# Altium PCB Touchscreen PCB.PcbDoc
Units mm, origin at the board's own origin, x right, y up, seen from the top; angles counter-clockwise.
Board outline 55 x 53 mm, 2 copper layers (L1 (Signal), L2 (Ground)); 49 components, 55 nets, 253 pads, 82 vias.
Unrouted connection lines stored in the file: 13.
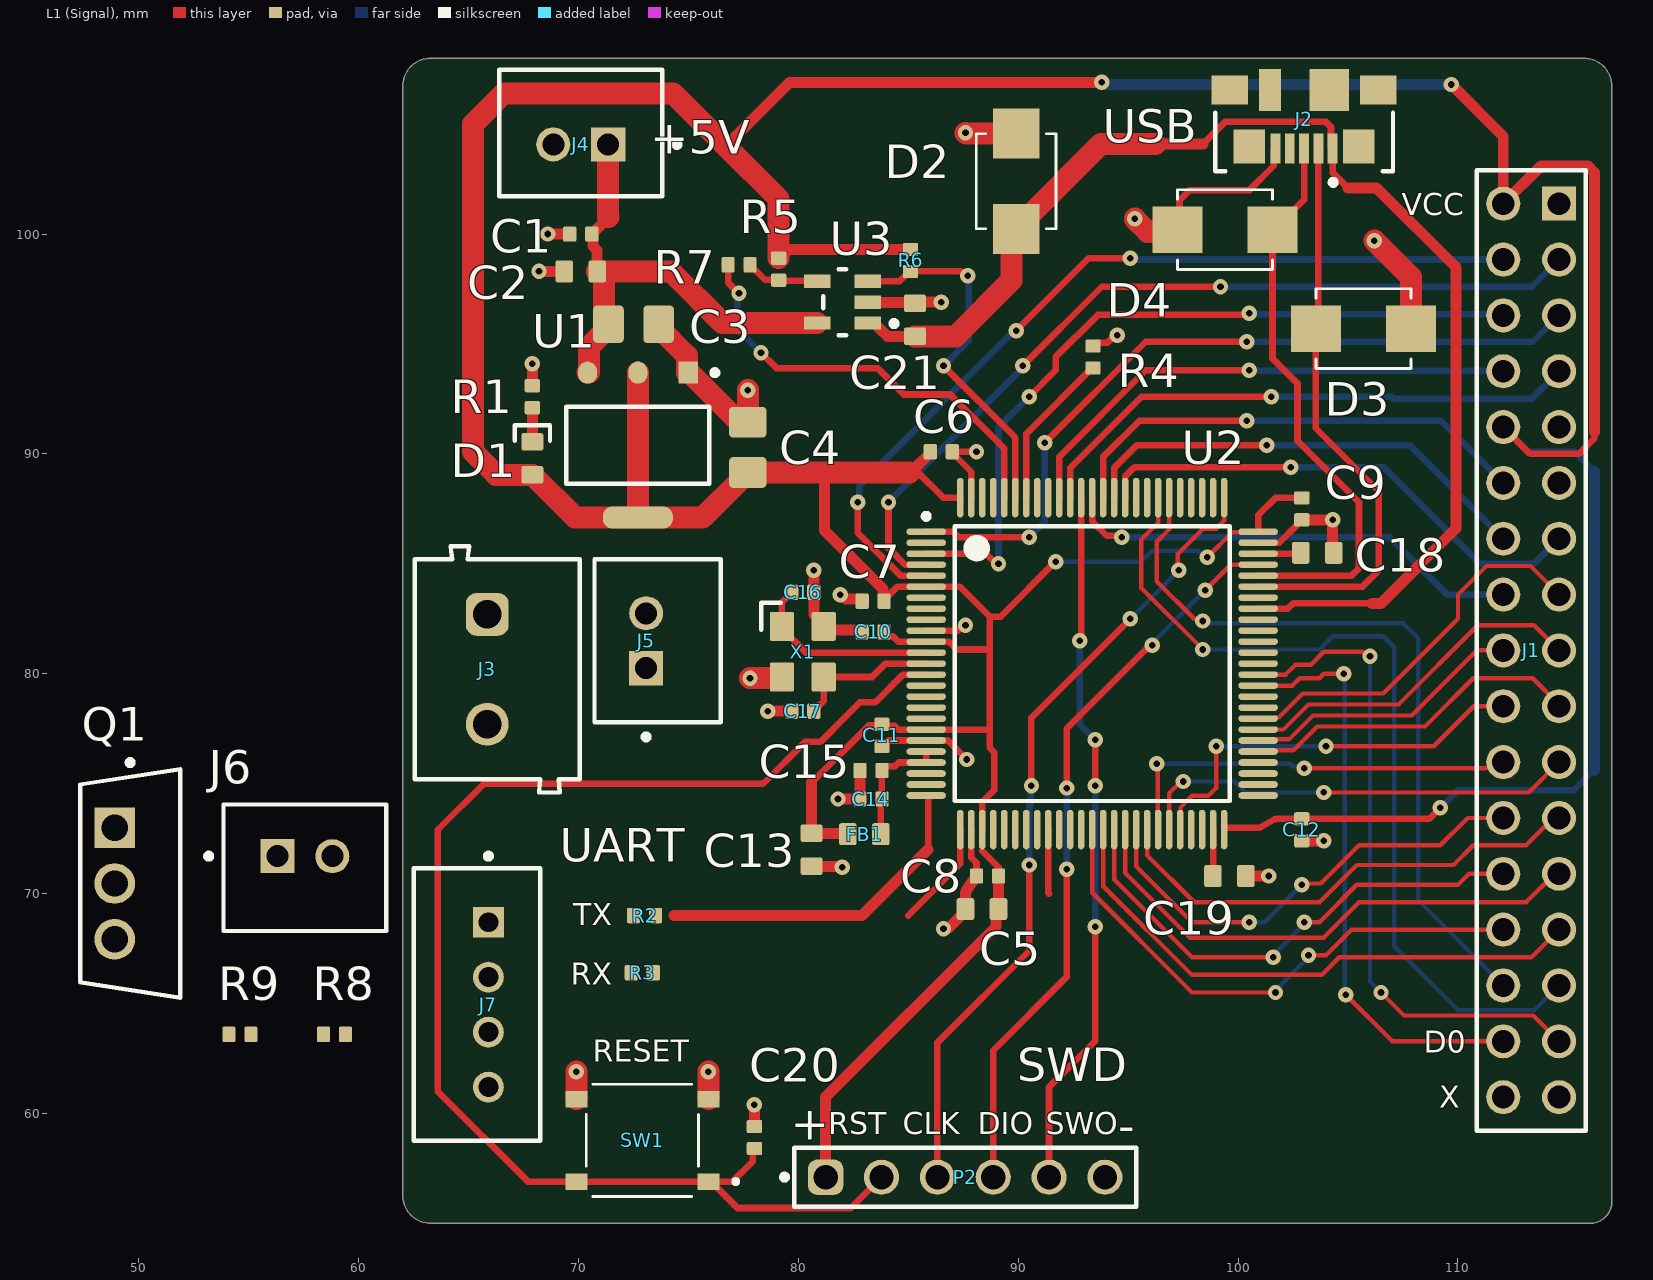
[diagram p0: L1 (Signal) view]
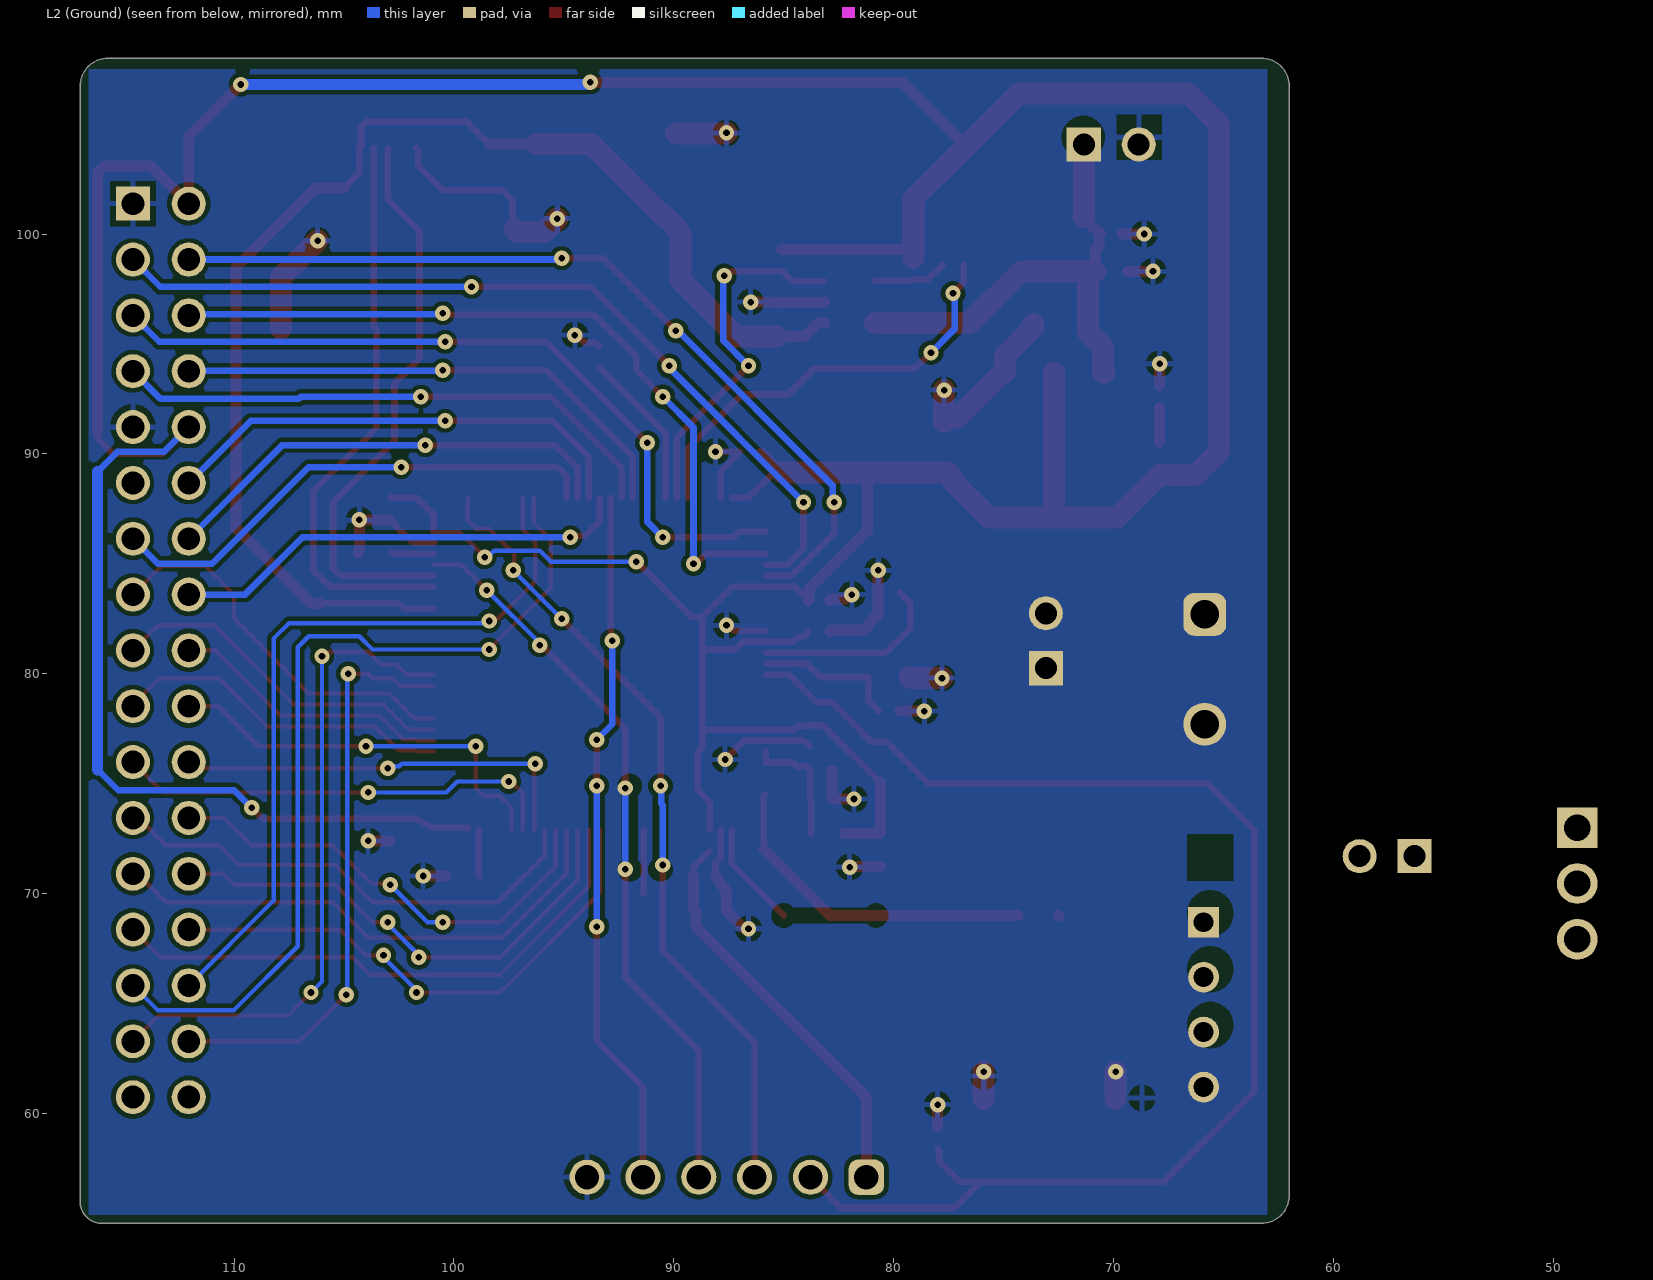
[diagram p1: L2 (Ground) view, seen from below]
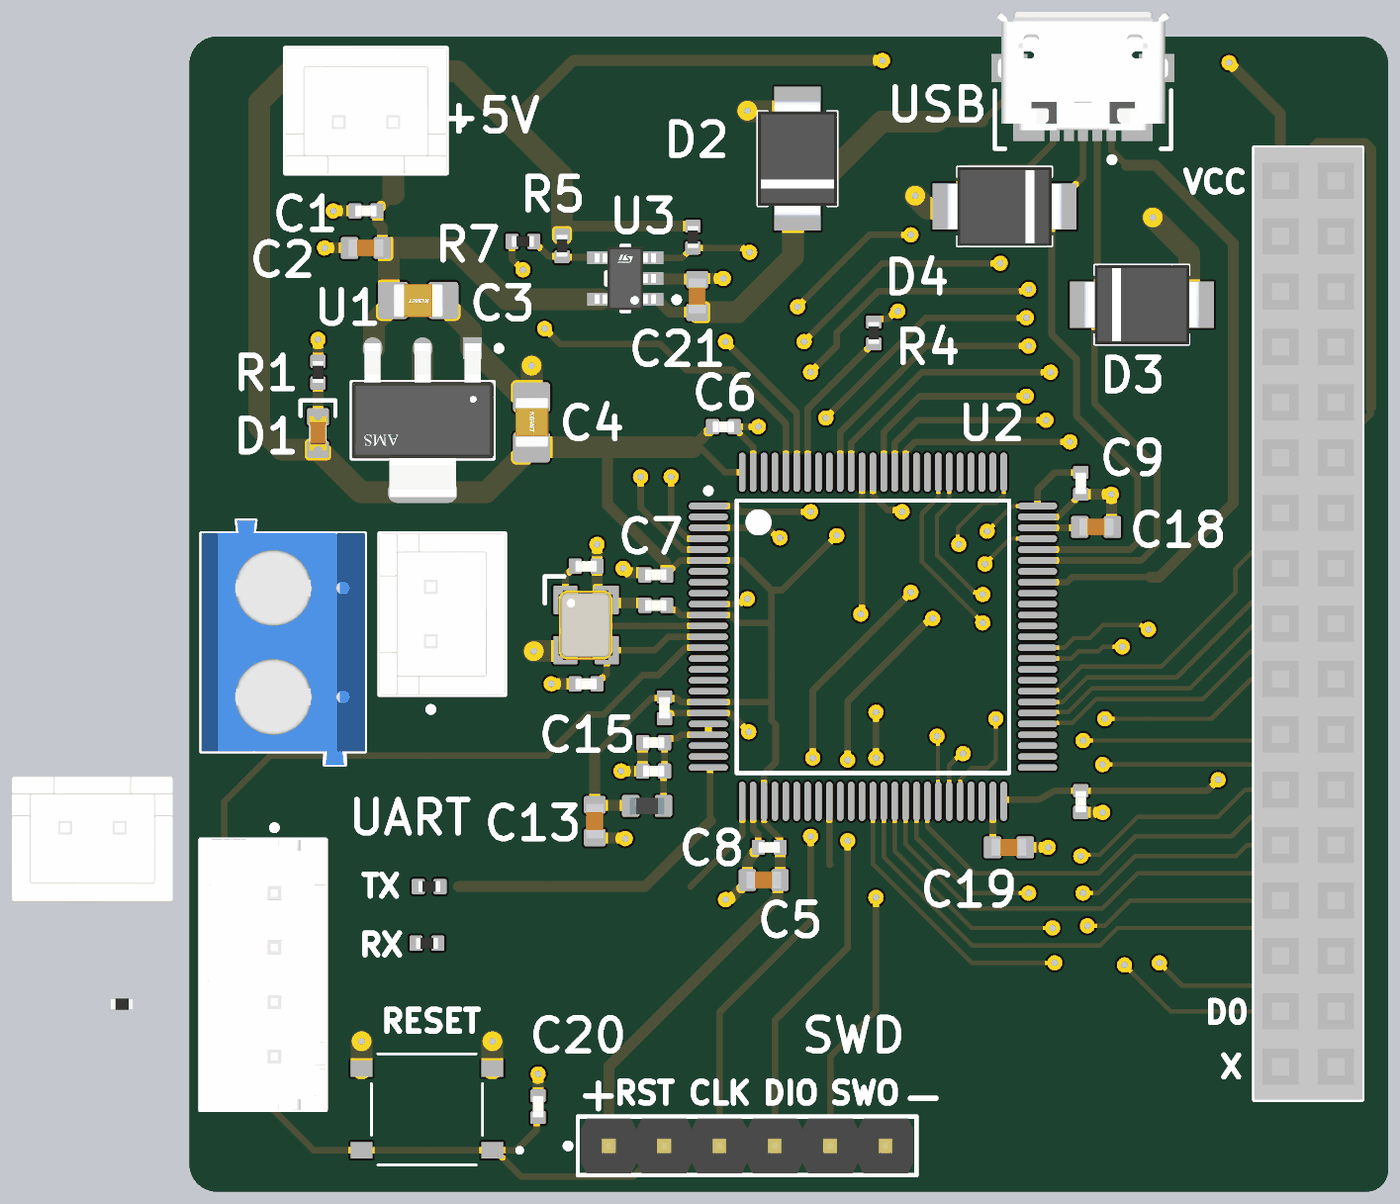
[diagram p2: 3D render of the assembled board from above, using the file's embedded part models]

## Layer stack, top to bottom
Top Solder: solder mask 0.0102, Solder Resist, Dk 3.5
L1 (Signal): signal copper 0.0356
Dielectric 1: dielectric 0.32, FR-4, Dk 4.8
L2 (Ground): signal copper 0.0356
Bottom Solder: solder mask 0.0102, Solder Resist, Dk 3.5

## Board outline
62,56.27 62,106.73 cw(c63.27,106.73) 63.27,108 115.73,108 cw(c115.73,106.73) 117,106.73 117,56 cw(c116,56) 116,55 63.27,55 cw(c63.27,56.27)

## Design rules (kind name [scope] priority, off if disabled: settings)
Clearance [All] p1: gap=0.2 ignorepadtopadclearanceinfootprint=FALSE
PolygonConnect [All] p1: connectstyle=Relief reliefconductorwidth=0.254 reliefentries=4 polygonreliefangle="90 Angle" airgapwidth=0.254
RoutingVias [All] p1: holewidth=0.3 width=0.7 viastyle="Through Hole" minholewidth=0.25 minwidth=0.55 maxholewidth=0.4 maxwidth=0.9
SolderMaskExpansion [All] p1: expansion=0.102 istentingtop=FALSE
SupplyNets "Schematic Supply Nets_3" [InNet('+24V')] p1: voltage=0.000
SupplyNets "Schematic Supply Nets_2" [InNet('+5V')] p2: voltage=0.000
SupplyNets "Schematic Supply Nets_1" [InNet('VCC')] p3: voltage=0.000
SupplyNets "Schematic Supply Nets" [InNet('GND')] p4: voltage=0.000
Width [All] p1: maxlimit=1 minlimit=0.2 preferedwidth=0.3 minimp=50.000000 maximp=50.000000 favimp=50.000000
30 further rules are at their usual default settings.

## Components (designator, comment, footprint, x,y, rotation, side; value= is the part's Value field where it differs from the comment)
C1 "100n" CAP_0402 70.1,100 r0 top
C2 "10u" CAP_0603 70.1,98.3 r0 top
C3 "22u" CAP_0805 72.5,95.9 r180 top
C4 "22u" CAP_0805 77.7,90.3 r270 top
C5 "10u" CAP_0603 88.35,69.3 r0 top
C6 "100n" CAP_0402 86.5,90.1 r180 top
C7 "100n" CAP_0402 83.4,83.3 r0 top
C8 "100n" CAP_0402 88.6,70.8 r0 top
C9 "100n" CAP_0402 102.9,87.5 r90 top
C10 "100n" CAP_0402 83.4,81.9 r0 top
C11 "100n" CAP_0402 83.8,77.2 r90 top
C12 "100n" CAP_0402 102.9,72.9 r90 top
C13 "10u" CAP_0603 80.6,72 r90 top
C14 "1u" CAP_0402 83.3,74.3 r180 top
C15 "100n" CAP_0402 83.3,75.6 r0 top
C16 "10p" CAP_0402 80.2,83.7 r180 top
C17 "10p" CAP_0402 80.2,78.3 r0 top
C18 "2u2" CAP_0603 103.6,85.5 r180 top
C19 "2u2" CAP_0603 99.6,70.8 r180 top
C20 "100n" CAP_0402 78,58.9 r270 top
C21 "4u7" CAP_0603 85.3,96.1 r270 top
D1 "RED" LED_0603_RED 67.9,89.8 r270 top
D2 "SMBJ6.5CA" DIOM4336X265N 89.9,102.4 r270 top
D3 "SMBJ6.5CA" DIOM4336X265N 105.7,95.7 r180 top
D4 "SMBJ6.5CA" DIOM4336X265N 99.4,100.2 r0 top
FB1 "120R" FB_0603 83,72.7 r0 top
J1 "2x17 Odd-Even" SMTC-SSW-117-01-X-D 114.6,101.38 r270 top
J2 "473460001" FP-473460001-MFG 103,106.2 r180 top
J3 "691102710002" 691102710002 66.3,80.2 r270 top
J4 "B2B-XH-A(LF)(SN)" FP-B2B-XH-A_LF_SN-MFG 70.1,104.6 r180 top
J5 "B2B-XH-A(LF)(SN)" FP-B2B-XH-A_LF_SN-MFG 73.6,81.5 r90 top
J6 "B2B-XH-A(LF)(SN)" FP-B2B-XH-A_LF_SN-MFG 57.55,71.175 r0 top
J7 "B4B-XH-A(LF)(SN)" FP-B4B-XH-A_LF_SN-MFG 65.375,64.95 r90 top
P2 "" 61300611121 87.59,57.1 r0 top
Q1 "IRLZ44NPbF" FP-PG-TO220-3-MFG 49.605,70.46 r0 top
R1 "4k7" RES_0402 67.9,92.6 r270 top
R2 "220" RES_0402 73,69 r0 top
R3 "220" RES_0402 72.9,66.4 r0 top
R4 "10k" RES_0402 93.4,94.4 r270 top
R5 "10k" RES_0402 79.1,98.4 r90 top
R6 "47k" RES_0402 85.1,98.8 r90 top
R7 "0" RES_0402 77.3,98.6 r0 top
R8 "1k" RES_0402 58.9,63.6 r0 top
R9 "10k" RES_0402 54.6,63.6 r0 top
SW1 "" SW_TS-1187A-B-A-B 72.9,58.775 r180 top
U1 "AMS1117-3.3" FP-AMS1117-IPC_C 72.7,90.4 r270 top
U2 "STM32F429VIT6" STM-LQFP100_N 93.361,80.461 r0 top
U3 "STMPS2141STR" FP-SOT23-5L-MFG 82,96.9 r180 top
X1 "16MHz" XTAL_3225 80.2,81 r270 top

## Footprints (in the part's own frame and the unit in brackets; to place one, negate y for a bottom-side part, rotate by r counter-clockwise, add the part's x,y. Pads: shape width x height; smd on the part's side, far side on the other; paste and mask are expansions set on the pad)
61300611121 [mm] "Pin Header, pitch 2.54 mm, THT, Vertical, single row, 6p"
  rrect50% 1.6x1.6 hole 1.1: 1(-6.35,0)
  round 1.6 hole 1.1: 2(-3.81,0) 3(-1.27,0) 4(1.27,0) 5(3.81,0) 6(6.35,0)
  silkscreen extent -8.34,-1.35 7.77,1.35, body extent -7.62,-1.27 7.62,1.27, height 8.57
691102710002 [mm] "5,00mm - modular - blue - Horizontal entry with pressure clamp - 9,9 mm height - 02p"
  rrect50% 1.95x1.95 hole 1.3: 1(-2.5,-0.45)
  round 1.95 hole 1.3: 2(2.5,-0.45)
  silkscreen extent -5.6,-3.75 5.6,3.75, body extent -5.6,-3.75 5.6,3.75, height 9.96
CAP_0402 [mm]
  rrect25% 0.6x0.7 smd: 1(-0.5,0) 2(0.5,0)
  body extent -0.5,-0.26 0.5,0.26, height 0.37
CAP_0603 [mm]
  rrect25% 0.8x1 smd: 1(-0.75,0) 2(0.75,0)
  body extent -0.8,-0.4 0.8,0.4, height 0.51
CAP_0805 [mm]
  rrect25% 1.4x1.7 smd: 1(-1.143,0) 2(1.143,0)
  body extent -1.15,-0.76 1.15,0.79, height 1.01
DIOM4336X265N [mm]
  rect 2.28x2.12 smd: 1(-2.165,0) 2(2.165,0)
  silkscreen extent -2.16,-1.81 2.16,1.81, body extent -2.68,-1.81 2.68,1.81, height 2.65
FB_0603 [mm]
  rrect25% 0.8x1 smd: 1(-0.75,0) 2(0.75,0)
  body extent -0.8,-0.4 0.8,0.4, height 0.81
FP-473460001-MFG [mm]
  rect 0.45x1.38 smd paste+0 mask+0: 1(-1.3,2.31) 2(-0.65,2.31) 3(0,2.31) 4(0.65,2.31) 5(1.3,2.31)
  rect 1.425x1.55 smd paste+0 mask+0: 6(-2.488,2.225) 7(2.488,2.225)
  rect 1.65x1.3 smd paste+0 mask+0: 8(-3.375,-0.35) 11(3.375,-0.35)
  rect 1.8x1.9 smd paste+0 mask+0: 9(-1.15,-0.35)
  rect 1x1.9 smd paste+0 mask+0: 10(1.55,-0.35)
  silkscreen extent -4.05,0.67 4.05,3.97, body extent -4.3,-2.48 4.3,3.45, height 0.25
FP-AMS1117-IPC_C [mm]
  rect 1.004x0.872 smd paste+0 mask+0: 1(-3.295,2.29)
  rrect100% 1.004x0.872 smd paste+0 mask+0: 2(-3.295,0) 3(-3.295,-2.29)
  rrect87% 1.004x3.182 smd paste+0 mask+0: 4(3.295,0)
  silkscreen extent -3.42,-3.25 1.75,3.63, body extent -3.9,-3.35 3.9,3.35, height 0.25
FP-B2B-XH-A_LF_SN-MFG [mm]
  rect 1.55x1.55 hole 1 paste-2539.97 mask+0: 1(-1.25,0.525)
  round 1.55 hole 1 paste-2539.97 mask+0: 2(1.25,0.525)
  silkscreen extent -4.5,-2.88 3.7,2.88, body extent -3.8,-2.98 3.8,2.98, height 0.25
FP-B4B-XH-A_LF_SN-MFG [mm]
  rect 1.4x1.4 hole 0.9 paste-2539.97 mask+0: 1(3.75,-0.525)
  round 1.4 hole 0.9 paste-2539.97 mask+0: 2(1.25,-0.525) 3(-1.25,-0.525) 4(-3.75,-0.525)
  silkscreen extent -6.2,-2.88 6.87,2.88, body extent -6.3,-2.98 6.3,2.98, height 0.25
FP-PG-TO220-3-MFG [mm]
  rect 1.85x1.85 hole 1.2 paste-2539.97 mask+0: 1(-0.705,2.54)
  round 1.85 hole 1.2 paste-2539.97 mask+0: 2(-0.705,0) 3(-0.705,-2.54)
  silkscreen extent -2.27,-5.2 2.27,5.62, body extent -2.37,-5.55 2.37,5.55, height 0.25
FP-SOT23-5L-MFG [mm]
  rect 1.2x0.6 smd paste+0 mask+0: 1(-1.15,0.95) 2(-1.15,0) 3(-1.15,-0.95) 4(1.15,-0.95) 5(1.15,0.95)
  silkscreen extent -2.48,-1.5 0.87,1.5, body extent -1.85,-1.6 1.85,1.6, height 0.25
LED_0603_RED [mm]
  rrect25% 0.8x1 smd: A(0.75,0) K(-0.75,0)
  silkscreen extent -1.5,-0.8 -0.8,0.8, body extent -0.8,-0.4 0.8,0.4, height 0.6
RES_0402 [mm]
  rrect25% 0.6x0.7 smd: 1(-0.5,0) 2(0.5,0)
  body extent -0.5,-0.25 0.5,0.25, height 0.3
SMTC-SSW-117-01-X-D [mm] "SQ Post Socket, 2x17 Pins, Vertical, 2.54mm Pitch, Female"
  rect 1.55x1.55 hole 1.04: 1(0,0)
  round 1.55 hole 1.04: 2(0,-2.54) 3(2.54,0) 4(2.54,-2.54) 5(5.08,0) 6(5.08,-2.54) 7(7.62,0) 8(7.62,-2.54) 9(10.16,0) 10(10.16,-2.54) 11(12.7,0) 12(12.7,-2.54) 13(15.24,0) 14(15.24,-2.54) 15(17.78,0) 16(17.78,-2.54) 17(20.32,0) 18(20.32,-2.54) 19(22.86,0) 20(22.86,-2.54) 21(25.4,0) 22(25.4,-2.54) 23(27.94,0) 24(27.94,-2.54) 25(30.48,0) 26(30.48,-2.54) 27(33.02,0) 28(33.02,-2.54) 29(35.56,0) 30(35.56,-2.54) 31(38.1,0) 32(38.1,-2.54) 33(40.64,0) 34(40.64,-2.54)
  silkscreen extent -1.53,-3.74 42.17,1.2, body extent -1.52,-3.75 42.16,1.21, height 8.51
STM-LQFP100_N [mm] "Thin QFP, 100-Leads, Body 14x14mm, Pitch 0.5mm, IPC Medium Density"
  oval 1.8x0.3 smd: 1(-7.55,6) 2(-7.55,5.5) 3(-7.55,5) 4(-7.55,4.5) 5(-7.55,4) 6(-7.55,3.5) 7(-7.55,3) 8(-7.55,2.5) 9(-7.55,2) 10(-7.55,1.5) 11(-7.55,1) 12(-7.55,0.5) 13(-7.55,0) 14(-7.55,-0.5) 15(-7.55,-1) 16(-7.55,-1.5) 17(-7.55,-2) 18(-7.55,-2.5) 19(-7.55,-3) 20(-7.55,-3.5) 21(-7.55,-4) 22(-7.55,-4.5) 23(-7.55,-5) 24(-7.55,-5.5) 25(-7.55,-6) 51(7.55,-6) 52(7.55,-5.5) 53(7.55,-5) 54(7.55,-4.5) 55(7.55,-4) 56(7.55,-3.5) 57(7.55,-3) 58(7.55,-2.5) 59(7.55,-2) 60(7.55,-1.5) 61(7.55,-1) 62(7.55,-0.5) 63(7.55,0) 64(7.55,0.5) 65(7.55,1) 66(7.55,1.5) 67(7.55,2) 68(7.55,2.5) 69(7.55,3) 70(7.55,3.5) 71(7.55,4) 72(7.55,4.5) 73(7.55,5) 74(7.55,5.5) 75(7.55,6)
  oval 0.3x1.8 smd: 26(-6,-7.55) 27(-5.5,-7.55) 28(-5,-7.55) 29(-4.5,-7.55) 30(-4,-7.55) 31(-3.5,-7.55) 32(-3,-7.55) 33(-2.5,-7.55) 34(-2,-7.55) 35(-1.5,-7.55) 36(-1,-7.55) 37(-0.5,-7.55) 38(0,-7.55) 39(0.5,-7.55) 40(1,-7.55) 41(1.5,-7.55) 42(2,-7.55) 43(2.5,-7.55) 44(3,-7.55) 45(3.5,-7.55) 46(4,-7.55) 47(4.5,-7.55) 48(5,-7.55) 49(5.5,-7.55) 50(6,-7.55) 76(6,7.55) 77(5.5,7.55) 78(5,7.55) 79(4.5,7.55) 80(4,7.55) 81(3.5,7.55) 82(3,7.55) 83(2.5,7.55) 84(2,7.55) 85(1.5,7.55) 86(1,7.55) 87(0.5,7.55) 88(0,7.55) 89(-0.5,7.55) 90(-1,7.55) 91(-1.5,7.55) 92(-2,7.55) 93(-2.5,7.55) 94(-3,7.55) 95(-3.5,7.55) 96(-4,7.55) 97(-4.5,7.55) 98(-5,7.55) 99(-5.5,7.55) 100(-6,7.55)
  silkscreen extent -7.67,-6.25 6.25,6.82, body extent -7,-7 7,7, height 1.6
SW_TS-1187A-B-A-B [mm]
  rect 1x0.75 smd: A(-3,1.875) B(3,1.875) C(-3,-1.875) D(3,-1.875)
  silkscreen extent -4.35,-2.55 2.55,2.55
XTAL_3225 [mm]
  rrect10% 1.3x1.1 smd: 1(-1.15,-0.95) 2(1.15,-0.95) 3(1.15,0.95) 4(-1.15,0.95)
  silkscreen extent -2.23,-1.89 -1,-1, body extent -1.6,-1.28 1.6,1.22, height 0.61

## Part data
C1 C6 C7 C8 C9 C10 C11 C12 C15 C20: library part CAP_0402, "Capacitor SMD 0402", LCSC=C1525, Manufacturer="Samsung Electro-Mechanics", Manufacturer Part Number=CL05B104KO5NNNC, Rating=16V
C2 C5 C13: library part CAP_0603, "Capacitor SMD 0603", LCSC=C96446, Manufacturer="*Samsung Electro-Mechanics", Manufacturer Part Number=CL10A106MA8NRNC, Rating=25V
C3 C4: library part CAP_0805, "Capacitor SMD 0805", LCSC=C45783, Manufacturer="Samsung Electro-Mechanics", Manufacturer Part Number=CL21A226MAQNNNE, Rating=25V
C14: library part CAP_0402, "Capacitor SMD 0402", LCSC=C52923, Manufacturer="Samsung Electro-Mechanics", Manufacturer Part Number=CL05A105KA5NQNC, Rating=25V
C16 C17: library part CAP_0402, "Capacitor SMD 0402", LCSC=C32949, Manufacturer="Samsung Electro-Mechanics", Manufacturer Part Number=CL05C100JB5NNNC, Rating=50V
C18 C19: library part CAP_0603, "Capacitor SMD 0603", LCSC=C23630, Manufacturer="Samsung Electro-Mechanics", Manufacturer Part Number=CL10A225KO8NNNC, Rating=16V
C21: library part CAP_0603, "Capacitor SMD 0603", LCSC=C19666, Manufacturer="Samsung Electro-Mechanics", Manufacturer Part Number=CL10A475KO8NNNC, Rating=16V
D1: library part LED_0603_RED, "LED 0603 RED SMD", LCSC=C2286, Manufacturer="Hubei KENTO Elec", Manufacturer Part Number=KT-0603R
D2 D3 D4: "53.57A 600W 11.2V 7.22V Bidirectional 6.5V SMB  ESD and Surge Protection (TVS/ESD) ROHS", LCSC=C7420377, Manufacturer=hongjiacheng, Manufacturer Part Number=SMBJ6.5CA
FB1: library part FB_0603, "Ferrite Bead SMD 0603", LCSC=C14709, Manufacturer="Murata Electronics", Manufacturer Part Number=BLM18PG121SN1D
J1: library part CMP-1023-00453-1, "SQ Post Socket, Through-hole, Vertical, -55 to 105 degC, 2.54 mm Pitch, 34-Pin, Female, RoHS", Manufacturer=Samtec, PartNumber=SSW-117-01-T-D, Temperature Range="-55 to 105 degC", ComponentLink1Description="Manufacturer URL", ComponentLink1URL=http://www.samtec.com, ComponentLink2Description=Datasheet, ComponentLink2URL=http://www.samtec.com/documents/webfiles/pdf/SSW_TH.PDF, ComponentLink3Description="Package Specification", ComponentLink3URL=http://www.samtec.com/documents/webfiles/cpdf/SSW-1XX-XX-XXX-X-XX-XXX-XX-MKT.pdf, DatasheetVersion=F-214, Mounting Technology=Through-hole, NotOnBOM=Yes, Orientation=Vertical, PackageDescription="Assembly, Socket Strip .016 X .031 Tail", PackageReference=SSW-117-01-X-D, PackageVersion="CA, 6/1987", Pitch="2.54 mm", RoHS=True
J2: library part CMP-2000-05246-2, "CONN RCPT USB2.0 MICRO B SMD R/A", Current Rating=1.8A, LCSC=C132560, Manufacturer=Molex, Package=0, Temperature="-30°C to +85°C", Temperature Range High=+85°C, Temperature Range Low=-30°C, Voltage Rating=30V, Automotive=No, Category=Conn, ComponentLink2Description=Datasheet, ComponentLink2URL=https://www.molex.com/webdocs/datasheets/pdf/en-us/0473460001_IO_CONNECTORS.pdf, Conn Orientation="Right Angle", Contact Material=Gold,Nickel, Device Class L1=Connectors, Device Class L2="USB Connectors", Device Class L3=unset, Digikey Description="CONN RCPT USB2.0 MICRO B SMD R/A", Footprint Url=https://www.molex.com/pdm_docs/sd/473460001_sd.pdf, Height=2.945mm, Is Female=yes, Lead Free=Yes, Manufacturer Part Number=473460001, Number of Contacts=5, Octopart=https://octopart.com/47346-0001-molex-7164928, Pitch=0.65mm, RoHS=TRUE, Shielding=true, Usb Standard="USB 2.0"
J3: library part CMP-1502-03258-2, Color=Blue, Current=15A, Max Operating Temperature=105°C, Min Operating Temperature=-40°C, Voltage=300V, Contact Material=Brass, Contact Plating=Tin, Current Rating=15A, Height=13.4mm, Housing Material=Nylon, Lead Pitch=5mm, Length=7.5mm, Mount="Through Hole", NexarPartId=8917706, Number of Contacts=2, Number of Levels=1, Number of Pins=2, Number of Positions Per Level=2, Packaging=Box, Pitch=5.0038mm, Plating=Steel, REACH SVHC=Unknown, RoHS=Compliant, Stripping Length=-6mm, Termination=Screw, Voltage Rating=300V, Width=11.2mm, Wire Gauge (Max)=22AWG, Wire Gauge (Min)=14AWG, Wire/Cable Gauge=22AWG
J4 J5 J6: library part CMP-2000-05888-3, "CONN HEADER VERT 2POS 2.5MM", Color=Natural, Contact Resistance=20mR, Current Rating=3A, Housing Color=White, Insulation Resistance=1GR, Max Operating Temperature=85°C, Max Voltage Rating (AC)=250V, Min Operating Temperature=-25°C, Connector Type="Male Pin", Contact Material=Brass, Contact Plating=Tin, Contact Type="Male Pin", Depth=5.75mm, Fastening Type=Detent, Housing Material=Polyamide, Lead Free="Lead Free", Lead Pitch=2.5mm, Length=7.4mm, Max Current Rating=3A, Max Voltage Rating (DC)=250V, Mount="Through Hole", Number of Contacts=2, Number of Positions=2, Number of Rows=1, Orientation=Straight, Packaging=Bulk, Pitch=2.5mm, REACH SVHC="No SVHC", Series=XH, Termination=Solder, Voltage Rating=250V, Voltage Rating (AC)=250V, Wire/Cable Gauge=22AWG
J7: library part CMP-17439-000250-1, "CONN HEADER VERT 4POS 2.5MM", Color=Natural, Contact Resistance=20mR, Current Rating=3A, Flammability Rating="UL94 V-0", Housing Color=White, Insulation Resistance=1GR, Max Operating Temperature=85°C, Max Voltage Rating (AC)=250V, Min Operating Temperature=-25°C, Package Quantity=500, Connector Type=Header, Contact Finish - Mating=TIN, Contact Material=Brass, Contact Plating=Tin, Contact Shape=Square, Contact Type="Male Pin", Depth=5.75mm, Fastening Type=Detent, Gender=Male, Housing Material=Polyamide, Insulation Color=Natural, Insulation Material=Nylon, Lead Free="Lead Free", Lead Pitch=2.5mm, Length=12.4mm, Mated Stacking Heights=9.8mm, Material=Polyamide, Max Current Rating=3A, Max Voltage Rating (DC)=250V, Mount="Through Hole", Number of Contacts=4, Number of Positions=4, Number of Rows=1, Orientation=Straight, Packaging=Bulk, Pitch=2.5mm, REACH SVHC="No SVHC", Series=XH, Termination=Solder, Voltage Rating=250V, Voltage Rating (AC)=250V, Wire/Cable Gauge=22AWG
P2: library part CMP-1502-01070-3, Color=Black, Contact Resistance=20mΩ, Current Rating=3A, Max Operating Temperature=105°C, Min Operating Temperature=-40°C, Operating Supply Voltage=250V, Connector Type="Male Pin", Contact Gender=Male, Contact Material=Copper, Contact Mating Length=5.9944mm, Contact Plating=Gold, Gender=Male, Height=8.89mm, Housing Material=PBT, Lead Free="Lead Free", Lead Pitch=2.54mm, Mount="Through Hole", NexarPartId=20084590, NotOnBOM=Yes, Number of Contacts=6, Number of Pins=6, Number of Positions=6, Number of Rows=1, Orientation=Vertical, Packaging=Bulk, Pitch=2.54mm, REACH SVHC=Unknown, RoHS=Compliant, Termination="Through Hole", Voltage Rating=250V
Q1: library part CMP-32901-000488-1, "MOSFET N-CH 55V 47A TO220AB", Case/Package=TO-220, Continuous Drain Current (ID)=47A, Drain to Source Breakdown Voltage=55V, Drain to Source Resistance=35mR, Gate to Source Voltage (Vgs)=16V, Input Capacitance=1.7nF, Max Operating Temperature=175°C, Max Power Dissipation=110W, Min Operating Temperature=-55°C, Threshold Voltage=2V, Drain to Source Voltage (Vdss)=55V, Element Configuration=Single, Halogen Free="Halogen Free", Height=0.6inch, Lead Free="Lead Free", Length=0.414inch, Max Dual Supply Voltage=55V, Mount="Through Hole", Number of Pins=3, Packaging=Rail/Tube, Power Dissipation=110W, Rds On Max=22mR, REACH SVHC="No SVHC", RoHS Compliant=Yes, Turn-Off Delay Time=26ns, Turn-On Delay Time=11ns, Width=0.185inch
R1: library part RES_0402, "Resistor SMD 0402", LCSC=C25900, Manufacturer="UNI-ROYAL(Uniroyal Elec)", Manufacturer Part Number=0402WGF4701TCE
R2 R3: library part RES_0402, "Resistor SMD 0402", LCSC=C25091, Manufacturer="UNI-ROYAL(Uniroyal Elec)", Manufacturer Part Number=0402WGF2200TCE
R4 R5 R9: library part RES_0402, "Resistor SMD 0402", LCSC=C25744, Manufacturer="UNI-ROYAL(Uniroyal Elec)", Manufacturer Part Number=0402WGF1002TCE
R6: library part RES_0402, "Resistor SMD 0402", LCSC=C25792, Manufacturer="UNI-ROYAL(Uniroyal Elec)", Manufacturer Part Number=0402WGF4702TCE
R7: library part RES_0402, "Resistor SMD 0402", LCSC=C17168, Manufacturer="UNI-ROYAL(Uniroyal Elec)", Manufacturer Part Number=0402WGF0000TCE
R8: library part RES_0402, "Resistor SMD 0402", LCSC=C11702, Manufacturer="UNI-ROYAL(Uniroyal Elec)", Manufacturer Part Number=0402WGF1001TCE
SW1: library part Push_Button_SW, "None Without 50mA 5.1mm 100000 Times 160gf 12V 5.1mm 1.5mm Round Button Standing paste SPST SMD Tactile Switches ROHS", LCSC=C318884, Manufacturer="XKB Connection", Manufacturer Part Number=TS-1187A-B-A-B
U1: library part CMP-209535-000001-1, "LDO Voltage Regulators 1A, 3.3V", Dropout Voltage=1.1V, LCSC=C6186, Manufacturer="Advanced Monolithic Systems", Max Junction Temp=+125°C, Max Power Dissipation=1.2W, Max Supply Voltage=15V, Nominal Supply Current=5mA, Output Current=1A, Output Voltage=3.3V, Package=AMS1117, Temperature="-40°C to +125°C", Temperature Range Low=-40°C, Automotive=No, Category=IC, ComponentLink2Description=Datasheet, ComponentLink2URL=http://www.advanced-monolithic.com/pdf/ds1117.pdf, Device Class L1="Integrated Circuits (ICs)", Device Class L2="Power Management ICs", Device Class L3="Voltage Regulators - Linear", Height=1.8mm, Ipc Land Pattern Name=SOT229P700X180-4, Lead Free=Yes, Manufacturer Part Number=AMS1117-3.3, Number Of Outputs=1, Octopart=https://octopart.com/ams1117-3.3-advanced+monolithic+systems-25899300, Output Type=Fixed, RoHS=TRUE, Standoff Height=0.64mm, Temperature Range High=+125°C
U2: library part CMP-0243-00030-2, "ARM Cortex-M4 32-bit MCU+FPU, 225 DMIPS, 2048 kB Flash, 256 kB Internal RAM, 82 I/Os, 100-pin LQFP, -40 to 85 degC, Tray", I/Os (High Current)=82, LCSC=C92002, Manufacturer=STMicroelectronics, Operating Frequency(F) (Processor speed) (MHz)=180, Supply Voltage(Vcc) max (V)=3.6, Supply Voltage(Vcc) min (V)=1.8, ComponentLink1Description="Manufacturer URL", ComponentLink1URL=http://www.st.com/web/en/home.html, ComponentLink2Description=Datasheet, ComponentLink2URL=http://www.st.com/st-web-ui/static/active/en/resource/technical/document/data_brief/DM00053488.pdf, ComponentLink3Description="Package Specification", ComponentLink3URL=http://www.st.com/st-web-ui/static/active/en/resource/technical/document/data_brief/DM00071938.pdf, Core="ARM Cortex-M4", D/A Converter=2x12-bit, DatasheetVersion="Rev. 2", FLASH Size (Prog) (kB)=2048, Internal RAM Size (kB)=256, Manufacturer Part Number=STM32F429VIT6, Mounting Technology="Surface Mount", PackageDescription="100-Pin Low Profile Quad Flat Package, 14 x 14 mm Body, 0.5 mm Pitch", PackageReference=LQFP100, PackageVersion="Rev. 1, 06/2013", Packing=Tray, PartNumber=STM32F429VIT6
U3: library part CMP-00355-07169648-1, "STMPS2141STR STMPS Series 1 Channel 5.5 V 500 mA 200 mOhm High Side Power Switch - SOT-23-5", Ambient Temperature Range High=85°C, Case/Package=SOT-23-5, Current=500mA, Drain to Source Resistance=90mΩ, LCSC=C54624, Manufacturer=STMicroelectronics, Max Input Voltage=5.5V, Max Junction Temperature (Tj)=125°C, Max Power Dissipation=32.5mW, Max Supply Current=40µA, Min Input Voltage=2.7V, Min Operating Temperature=-40°C, Nominal Input Voltage=5V, Output Current=0A, Resistance=120mΩ, Current Rating=500mA, Fault Protection="Over Temperature, Reverse Current", Height=1.3mm, Interface=On/Off, Lead Free="Lead Free", Length=3mm, Lifecycle Status=Production, Manufacturer Part Number=STMPS2141STR, Max Operating Temperature=85°C, Max Output Current=500mA, Max Supply Voltage=5.5V, Min Supply Voltage=2.7V, Mount="Surface Mount", NexarPartId=7169648, Nominal Supply Current=40µA, Number of Channels=1, Number of Inputs=1, Number Of Outputs=1, Number of Pins=5, Operating Supply Voltage=5.5V, Output Configuration="High Side", Output Voltage=5V, Packaging="Tape & Reel (TR)", Power Dissipation=32.5mW, Radiation Hardening=No, RoHS=Compliant, Schedule B=8542390000, Turn-Off Delay Time=10ms, Turn-On Delay Time=5ms, Voltage=5.5V, Width=1.75mm
X1: library part X3225_16MHZ, LCSC=C13738, Manufacturer="YXC Crystal Oscillators", Manufacturer Part Number=X322516MLB4SI

## Via types
v1: diameter 0.7, hole 0.3, L1 (Signal) to L2 (Ground), 82 vias

## Nets (pads, with @x,y where several pads share a name; then routed paths per layer and width w, separated by ;. In a path a pad name is that pad's centre, name@x,y a point inside that pad or via, vN(x,y) a via of type N, cw(c..) or ccw(c..) an arc to the next point about the centre after c; other vN are vias at no path point)
+5V: C1.2 C2.2 C3.2 J4.1 U1.3 U3.5 | length 22.3
  L1 (Signal) w0.5: C2.2 70.85,99.25 70.65,99.45 70.65,99.95 C1.2 70.6,100.05 70.65,100.1 70.7,100.1 71.37,100.77
  L1 (Signal) w1: U1.3 70.472,93.695 70.474,93.697 70.474,94.867 71.157,95.55 71.157,97.993 C2.2 74.2,98.3 76.55,95.95 U3.5 ; J4.1 71.35,100.79 71.37,100.77
+24V: J3.2 J5.1 J6.1
BL_PWM: J1.8 U2.91 | length 23.7
  L1 (Signal) w0.3: U2.91 91.861,89.861 95.8,93.8 v1(100.5,93.8)
  L2 (Ground) w0.3: v1(100.5,93.8) 100.52,93.78 112.04,93.78 J1.8
BOOT: R4.2 U2.94 | length 7.2
  L1 (Signal) w0.3: U2.94 90.361,90.911 93.35,93.9 R4.2
FAN_EN: R8.1 R9.2 U2.34 | length 2.9
  L1 (Signal) w0.3: U2.34 91.361,70.039 91.4,70
FAN_PWR: J5.2 J6.2 Q1.2
FMC_A16: J1.15 U2.58 | length 17.7
  L1 (Signal) w0.2: U2.58 101.688,77.961 101.738,78.011 101.847,78.011 102.936,79.1 106.6,79.1 110,82.5 110,83.6 111.3,84.9 113.3,84.9 J1.15
FMC_D0: J1.32 U2.61 | length 26.8
  L1 (Signal) w0.2: U2.61 102.461,79.461 102.8,79.8 103.7,79.8 103.9,80 v1(104.8,80) ; v1(104.9,65.4) 107.02,63.28 J1.32
  L2 (Ground) w0.2: v1(104.8,80) 104.85,79.95 104.85,65.45 v1(104.9,65.4)
FMC_D1: J1.31 U2.62 | length 30.1
  L1 (Signal) w0.2: U2.62 102.161,79.961 102.6,80.4 103.3,80.4 103.9,81 105.665,81 105.865,80.8 v1(106,80.8) ; v1(106.5,65.5) 107.543,64.457 113.423,64.457 J1.31
  L2 (Ground) w0.2: v1(106,80.8) 106,66 v1(106.5,65.5)
FMC_D2: J1.30 U2.81 | length 34.4
  L1 (Signal) w0.2: U2.81 96.861,86.561 96.3,86 96.3,84.2 98.004,82.496 98.304,82.496 v1(98.4,82.4)
  L2 (Ground) w0.2: v1(98.4,82.4) 98.496,82.304 98.763,82.304 98.767,82.3 107.5,82.3 108.2,81.6 108.2,69.68 J1.30
FMC_D3: J1.29 U2.82 | length 40.3
  L1 (Signal) w0.2: U2.82 96.361,86.861 95.6,86.1 95.6,83.9 v1(98.4,81.1)
  L2 (Ground) w0.2: v1(98.4,81.1) 103.7,81.1 104.3,81.7 106.6,81.7 107.1,81.2 107.1,67.6 110,64.7 113.48,64.7 J1.29
FMC_D4: J1.28 U2.38 | length 24.8
  L1 (Signal) w0.2: U2.38 93.361,70.039 97.9,65.5 v1(101.7,65.5) ; v1(103.2,67.2) 104,67.2 105.16,68.36 J1.28
  L2 (Ground) w0.2: v1(101.7,65.5) 101.7,65.6 103.2,67.1 v1(103.2,67.2)
FMC_D5: J1.27 U2.39 | length 25.8
  L1 (Signal) w0.2: U2.39 93.861,70.339 97.9,66.3 103.8,66.3 104.6,67.1 113.34,67.1 J1.27
FMC_D6: J1.26 U2.40 | length 23.1
  L1 (Signal) w0.2: U2.40 94.361,70.639 97.9,67.1 v1(101.6,67.1) ; v1(103,68.7) 103.7,68.7 105.4,70.4 110,70.4 110.5,70.9 J1.26
  L2 (Ground) w0.2: v1(101.6,67.1) 101.6,67.2 103,68.6 v1(103,68.7)
FMC_D7: J1.25 U2.41 | length 24.1
  L1 (Signal) w0.2: U2.41 94.861,70.939 97.8,68 103.9,68 105.5,69.6 113.1,69.6 114.4,70.9 J1.25
FMC_D8: J1.24 U2.42 | length 21.4
  L1 (Signal) w0.2: U2.42 95.361,71.239 97.9,68.7 v1(100.5,68.7) ; v1(102.9,70.4) 102.96,70.46 103.76,70.46 105.5,72.2 109.2,72.2 110.44,73.44 J1.24
  L2 (Ground) w0.2: v1(100.5,68.7) 101.2,68.7 v1(102.9,70.4)
FMC_D9: J1.23 U2.43 | length 22.4
  L1 (Signal) w0.2: U2.43 95.861,71.739 98,69.6 103.7,69.6 105.4,71.3 109.8,71.3 110.7,72.2 113.1,72.2 114.34,73.44 J1.23
FMC_D10: J1.22 U2.44 | length 19
  L1 (Signal) w0.2: v1(96.3,75.9) 96.342,75.858 96.342,72.93 U2.44 ; v1(103,75.7) 111.268,75.7 111.29,75.722 111.802,75.722 J1.22
  L2 (Ground) w0.2: v1(96.3,75.9) 102.381,75.9 102.485,75.796 102.904,75.796 v1(103,75.7)
FMC_D11: J1.21 U2.45 | length 20.4
  L1 (Signal) w0.2: U2.45 96.861,74.561 97.4,75.1 v1(97.5,75.1) ; v1(103.9,74.6) 113.22,74.6 J1.21
  L2 (Ground) w0.2: v1(97.5,75.1) 99.852,75.1 100.352,74.6 v1(103.9,74.6)
FMC_D12: J1.20 U2.46 | length 18.7
  L1 (Signal) w0.2: U2.46 97.38,72.93 97.38,73.911 97.919,74.45 98.35,74.45 98.65,74.45 99,74.8 v1(99,76.7) ; v1(104,76.7) 108.9,76.7 110.72,78.52 J1.20
  L2 (Ground) w0.2: v1(99,76.7) v1(104,76.7)
FMC_D13: J1.19 U2.55 | length 15.6
  L1 (Signal) w0.2: U2.55 101.688,76.461 101.738,76.511 102.511,76.511 103.6,77.6 108.5,77.6 110.7,79.8 113.4,79.8 114.6,78.6 J1.19
FMC_D14: J1.18 U2.56 | length 12.8
  L1 (Signal) w0.2: U2.56 101.688,76.961 101.738,77.011 102.314,77.011 103.403,78.1 107.9,78.1 110.86,81.06 J1.18
FMC_D15: J1.17 U2.57 | length 16.1
  L1 (Signal) w0.2: U2.57 102.061,77.461 103.2,78.6 107.3,78.6 110.9,82.2 113.46,82.2 J1.17
FMC_NE1: J1.16 U2.88 | length 21.2
  L1 (Signal) w0.3: U2.88 93.361,86.939 94.023,86.277 94.623,86.277 v1(94.7,86.2)
  L2 (Ground) w0.3: v1(94.7,86.2) 106.9,86.2 109.5,83.6 J1.16
FMC_NOE: J1.13 U2.85 | length 23.2
  L1 (Signal) w0.3: U2.85 94.861,88.968 95.293,89.4 v1(102.4,89.4)
  L2 (Ground) w0.3: v1(102.4,89.4) 106.6,89.4 111,85 113.46,85 J1.13
FMC_NWE: J1.14 U2.86 | length 21.2
  L1 (Signal) w0.3: U2.86 94.361,89.361 95.4,90.4 v1(101.3,90.4)
  L2 (Ground) w0.3: v1(101.3,90.4) 107.8,90.4 J1.14
GND: C1.1 C2.1 C3.1 C4.1 C5.1 C6.1 C7.1 C8.1 C9.1 C10.1 C11.1 C12.1 C13.1 C14.2 C15.1 C16.1 C17.1 C18.1 C19.1 C20.1 C21.1 D2.1 D3.1 D4.1 J1.1 J1.9 J2.5 J3.1 J4.2 P2.6 Q1.3 R1.1 R4.1 R9.1 SW1.C SW1.D U1.1 U2.10 U2.20 U2.27 U2.74 U2.99 U3.2 X1.2 X1.4 | length 70.4
  L1 (Signal) w0.3: C13.1 C13.1@80.625,71.225 ; C11.1 83.85,76.7 84.111,76.961 86.8,76.961 v1(87.661,76.1) ; U2.10 87.253,81.961 87.492,82.2 v1(87.6,82.2) ; U2.27 87.861,71.639 88.1,71.4 C8.1 ; U2.99 87.861,89.189 87,90.05 C6.1 v1(88.1,90.1) ; R4.1 93.55,95.05 94.042,95.05 94.392,95.4 v1(94.5,95.4) ; D4.1 97.334,100.299 97.334,101.534 97.8,102 100.52,102 101.625,103.105 101.625,103.815 J2.5 ; U2.74 101.868,85.961 102.7,86.793 102.7,86.85 102.85,87 C9.1
  L1 (Signal) w0.5: R1.1 67.9,93.15 v1(67.9,94.1) ; v1(68.2,98.3) C2.1 ; v1(68.6,100) C1.1 ; SW1.D@69.65,60.7 SW1.D ; C20.1 v1(78,60.4) ; v1(78.6,78.3) C17.1 ; C13.1@80.625,71.225 81.975,71.225 v1(82,71.2) ; v1(80.7,84.7) C16.1 80.7,82.7 81.15,82.25 X1.4 81.3,82 82.85,82 82.9,81.95 C10.1 ; v1(81.8,74.3) C14.2 C15.1 ; v1(81.9,83.6) 81.954,83.6 82.154,83.4 82.85,83.4 82.9,83.35 C7.1 ; U3.2 83.175,96.875 85.275,96.875 C21.1 85.55,96.9 v1(86.5,96.9) ; v1(86.6,68.4) 86.638,68.438 86.838,68.438 87.6,69.2 C5.1 87.6,69.94 cw(c88.1,69.94) 87.693,70.23 C8.1 ; C19.1 v1(101.4,70.8) ; C12.1 103,72.4 v1(103.9,72.4) ; C9.1 v1(104.3,87) 104.3,85.75 C18.1
  L1 (Signal) w1: SW1.D v1(69.9,61.9) ; C3.1 73.643,95.75 74.926,94.467 74.926,93.697 74.928,93.695 U1.1 75.052,93.695 77.104,91.643 77.5,91.643 C4.1 v1(77.7,92.9) ; SW1.C v1(75.9,61.9) ; v1(77.8,79.8) 79.2,79.8 X1.2 ; v1(87.6,104.6) 87.635,104.565 D2.1 ; v1(95.3,100.7) 95.3,100.686 95.886,100.1 97.135,100.1 D4.1 ; v1(106.2,99.7) 107.865,98.035 D3.1
HSE_IN: C16.2 U2.12 X1.1 | length 8.8
  L1 (Signal) w0.3: X1.1@79.25,82.05 80.339,80.961 U2.12 ; X1.1 79.25,83.25 79.5,83.5 79.55,83.5 79.7,83.65 C16.2
HSE_OUT: C17.2 U2.13 X1.3 | length 6.7
  L1 (Signal) w0.3: C17.2 80.7,78.35 80.924,78.574 80.974,78.574 81.15,78.75 X1.3 83.35,79.85 83.961,80.461 U2.13
LCD_NRST: J1.12 U2.87 | length 21.9
  L1 (Signal) w0.3: U2.87 93.861,89.861 95.5,91.5 v1(100.4,91.5)
  L2 (Ground) w0.3: v1(100.4,91.5) 109.24,91.5 J1.12
LED_PWK_K: D1.K R1.2 | length 1.5
  L1 (Signal) w0.5: D1.K R1.2
NetQ1_1: Q1.1 R8.2
OTG_FS_DM: D3.2 J2.2 U2.70 | length 26.2
  L1 (Signal) w0.3: U2.70 105.661,83.961 106.4,84.7 106.4,88.3 103.535,91.165 D3.2 103.65,95.815 J2.2
OTG_FS_DP: D4.2 J2.3 U2.71 | length 26
  L1 (Signal) w0.3: U2.71 105.161,84.461 105.5,84.8 105.5,87.8 102.7,90.6 102.7,93.2 101.565,94.335 D4.2 ; D4.2@101.645,100.2 103,101.555 J2.3
OTG_FS_OC: R6.1 U2.95 U3.3 | length 16.8
  L1 (Signal) w0.3: U3.3 84.6,97.85 85.05,98.3 87.392,98.3 87.592,98.1 v1(87.7,98.1) ; v1(86.6,94) 89.861,90.739 U2.95
  L2 (Ground) w0.3: v1(86.6,94) 87.75,95.15 87.75,98.05 v1(87.7,98.1)
OTG_FS_PSO: R7.1 U2.96 | length 19.8
  L1 (Signal) w0.3: R7.1 76.8,97.8 v1(77.3,97.3) ; v1(78.3,94.6) 79,93.9 83.6,93.9 84.8,92.7 86.9,92.7 89.361,90.239 U2.96
  L2 (Ground) w0.3: v1(77.3,97.3) 77.223,97.223 77.223,95.677 v1(78.3,94.6)
PWR_SW_EN: R5.1 R7.2 U3.4 | length 3.4
  L1 (Signal) w0.3: R7.2 77.8,98.55 77.95,98.4 78,98.4 78.479,97.921 79.079,97.921 79.125,97.875 80.825,97.875 U3.4
RX: J7.3 R3.1
SWD_NRST: C20.2 P2.2 SW1.A SW1.B U2.14 | length 63
  L1 (Signal) w0.3: C20.2 77.929,58.329 77.929,57.829 77,56.9 SW1.A ; P2.2 82.38,55.7 77.225,55.7 76.025,56.9 SW1.A ; U2.14 84.761,79.961 83.5,78.7 82.8,78.7 82.1,78 81,76.9 80.3,76.9 78.4,75 65.7,75 63.6,72.9 63.6,61 67.7,56.9 SW1.B SW1.A
SWDCLK: P2.3 U2.76 | length 36.7
  L1 (Signal) w0.2: v1(97.3,84.7) 97.25,84.75 97.25,85.45 98.4,86.6 99,86.6 99.361,86.961 U2.76
  L1 (Signal) w0.3: P2.3 86.32,63.22 90.5,67.4 v1(90.5,71.3) ; v1(90.6,74.9) 90.6,78 v1(95.1,82.5)
  L2 (Ground) w0.2: v1(95.1,82.5) v1(97.3,84.7)
  L2 (Ground) w0.3: v1(90.5,71.3) 90.5,74.027 90.573,74.1 90.573,74.873 v1(90.6,74.9)
SWDIO: P2.4 U2.72 | length 33.6
  L1 (Signal) w0.2: v1(98.5,83.8) 99.661,84.961 U2.72
  L1 (Signal) w0.3: P2.4 88.86,62.86 92.2,66.2 v1(92.2,71.1) ; v1(92.2,74.8) 92.2,77.5 96,81.3 v1(96.1,81.3)
  L2 (Ground) w0.2: v1(96.1,81.3) 96.1,81.4 v1(98.5,83.8)
  L2 (Ground) w0.3: v1(92.2,71.1) v1(92.2,74.8)
SWDO: P2.5 U2.89 | length 32.1
  L1 (Signal) w0.3: P2.5 91.4,61.2 93.5,63.3 v1(93.5,68.5) ; v1(92.8,81.5) 92.861,81.561 U2.89 ; v1(93.5,74.9) v1(93.5,77)
  L2 (Ground) w0.3: v1(92.8,81.5) 92.8,77.7 v1(93.5,77) ; v1(93.5,68.5) v1(93.5,74.9)
TP_CS: J1.6 U2.3 | length 35.2
  L1 (Signal) w0.3: U2.3 88.531,85.461 88.992,85 v1(89.1,85) ; v1(90.5,92.6) 91.7,93.8 91.7,94.4 93.623,96.323 100.423,96.323 v1(100.5,96.4)
  L2 (Ground) w0.3: v1(89.1,85) 89.1,91.2 v1(90.5,92.6) ; v1(100.5,96.4) 100.55,96.35 112.01,96.35 J1.6
TP_IRQ: J1.7 U2.90 | length 25.5
  L1 (Signal) w0.3: U2.90 92.361,89.361 95.6,92.6 v1(101.5,92.6)
  L2 (Ground) w0.3: v1(101.5,92.6) 106.974,92.6 107.074,92.5 113.34,92.5 J1.7
TP_SCK: J1.5 U2.1 | length 35.2
  L1 (Signal) w0.3: U2.1 87.039,86.461 87.3,86.2 v1(90.5,86.2) ; v1(91.2,90.5) 95.8,95.1 v1(100.4,95.1)
  L2 (Ground) w0.3: v1(90.5,86.2) 91.2,86.9 v1(91.2,90.5) ; v1(100.4,95.1) 113.4,95.1 J1.5
TP_SDI: J1.4 U2.5 | length 39.7
  L1 (Signal) w0.3: v1(82.7,87.8) 82.7,86.408 84.647,84.461 U2.5 ; v1(89.9,95.6) 93.2,98.9 v1(95.1,98.9)
  L2 (Ground) w0.3: v1(82.7,87.8) 82.777,87.877 82.777,88.568 89.808,95.6 v1(89.9,95.6) ; v1(95.1,98.9) 95.16,98.84 J1.4
TP_SDO: J1.3 U2.4 | length 39.2
  L1 (Signal) w0.3: v1(84.1,87.8) 84.1,85.715 84.854,84.961 U2.4 ; v1(90.2,94) 93.8,97.6 v1(99.2,97.6)
  L2 (Ground) w0.3: v1(84.1,87.8) 90.2,93.9 v1(90.2,94) ; v1(99.2,97.6) 113.36,97.6 J1.3
TX: J7.2 R2.1 | length 0
  L1 (Signal) w0.5: R2.1@72.48,68.98 R2.1
USART2_RX: R3.2 U2.26 | length 4.9
  L1 (Signal) w0.3: 85,69 87.361,71.361 U2.26
USART2_TX: R2.2 U2.25 | length 15.3
  L1 (Signal) w0.3: U2.25 85.9,74.461 85.9,72
  L1 (Signal) w0.5: 74.35,69 82.9,69 85.9,72
VBUS_FS: C21.2 D2.2 J2.1 U2.68 U3.1 | length 58.6
  L1 (Signal) w0.3: 98.4,104.1 99.4,105.1 104,105.1 104.225,104.875 104.225,103.965 J2.1 104.3,102.8 105,102.1 ; U2.68 102.261,82.961 102.5,83.2 106.1,83.2
  L1 (Signal) w0.5: U3.1 83.45,95.95 83.757,95.643 84.05,95.35 C21.2 ; 96.245,104.1 98.4,104.1 ; 105,102.1 106.3,102.1 109.9,98.5 109.9,86.6 106.5,83.2 106.1,83.2
  L1 (Signal) w1: C21.2 87.15,95.35 89.695,97.895 89.695,100.03 D2.2 89.9,100.315 90.46,100.875 90.54,100.875 93.765,104.1 96.245,104.1
VCAP_1: C19.2 U2.49 | length 2.1
  L1 (Signal) w0.3: C19.2 98.861,70.811 U2.49
VCAP_2: C18.2 U2.73 | length 2
  L1 (Signal) w0.3: U2.73 102.811,85.461 C18.2
VCC: C4.2 C5.2 C6.2 C7.2 C8.2 C9.2 C10.2 C11.2 C12.2 C13.2 D1.A FB1.1 J1.2 J1.10 P2.1 R5.2 R6.2 U1.2 U1.4 U2.6 U2.11 U2.19 U2.28 U2.50 U2.75 U2.100 | length 248.6
  L1 (Signal) w0.2: v1(98.6,85.3) 99.742,86.442 100.892,86.442 U2.75
  L1 (Signal) w0.3: C13.2 C13.2@80.625,72.725 ; 80.6,75.042 83.208,77.65 83.75,77.65 C11.2 83.871,77.629 84.371,77.629 84.539,77.461 U2.19 88.7,77.461 ; FB1.1@82.225,72.725 FB1.1 ; C10.2 83.9,81.85 84.05,81.7 84.3,81.7 84.539,81.461 U2.11 86.839,81.461 87.2,81.1 88.7,81.1 ; C7.2@83.9,83.35 84.511,83.961 U2.6 87.339,83.961 88.7,82.6 ; 85.057,89.157 85.107,89.157 85.443,89.157 86.589,88.011 U2.100 ; C6.2@86,90.05 C6.2 ; 88.361,71.939 89.1,71.2 C8.2 ; U2.28 88.361,74.161 88.9,74.7 88.9,76.426 88.7,76.626 88.7,82.6 ; v1(91.7,85.1) 89.2,82.6 88.7,82.6 ; U2.50 99.361,72.996 100.913,72.996 ccw(c100.913,73.296) 101.062,73.035 101.631,73.36 cw(c101.78,73.1) 101.78,73.4 102.7,73.4 C12.2 108.7,73.4 v1(109.2,73.9) ; U2.75 100.911,87.211 101.7,88 C9.2 ; J1.10 113.28,90 115.5,90 116.2,90.7 116.2,91
  L1 (Signal) w0.5: 76.7,104 79.6,106.9 v1(93.8,106.9) ; R5.2 79.15,98.9 79.55,99.3 R6.2 ; C13.2 80.6,75.042 ; C13.2@80.625,72.725 FB1.1@82.225,72.725 ; 81.179,89.157 81.179,86.521 83.85,83.85 83.85,83.35 C7.2 ; P2.1 81.24,60.74 88.999,68.499 88.999,69.199 C5.2 C8.2 ; 85.107,89.157 C6.2@86,90.05 ; v1(109.7,106.8) 112.06,104.44 J1.2 113.78,103.1 115.907,103.1 116.2,102.807 116.2,91
  L1 (Signal) w1: U1.2 U1.4 ; R5.2 79.1,101.6 76.7,104 74.3,106.4 66.6,106.4 65.2,105 65.2,90.1 66.25,89.05 D1.A 69.845,87.105 U1.4 ; 85.057,89.157 81.179,89.157 C4.2 77.55,89.157 77.35,88.957 77.35,88.807 75.648,87.105 U1.4
  L2 (Ground) w0.2: v1(91.7,85.1) 95.6,85.1 96.1,85.6 98.165,85.6 98.465,85.3 v1(98.6,85.3)
  L2 (Ground) w0.3: v1(109.2,73.9) 110,74.7 115.269,74.7 116.2,75.631 ; J1.10 113.185,90.095 115.305,90.095 116.2,89.2
  L2 (Ground) w0.5: v1(93.8,106.9) 93.854,106.9 93.954,106.8 v1(109.7,106.8) ; 116.2,75.631 116.2,89.2
VDDA: C14.1 C15.2 FB1.2 U2.21 U2.22 | length 5.6
  L1 (Signal) w0.3: FB1.2 83.75,74.25 C14.1 C15.2 ; C15.2@83.8,75.65 83.95,75.8 84.4,75.8 84.561,75.961 U2.22 U2.21
pads on no net: J1.11 J1.33 J1.34 J2.4 J2.6 J2.7 J2.8 J2.9 J2.10 J2.11 J7.1 J7.4 U2.2 U2.7 U2.8 U2.9 U2.15 U2.16 U2.17 U2.18 U2.23 U2.24 U2.29 U2.30 U2.31 U2.32 U2.33 U2.35 U2.36 U2.37 U2.47 U2.48 U2.51 U2.52 U2.53 U2.54 U2.59 U2.60 U2.63 U2.64 U2.65 U2.66 U2.67 U2.69 U2.77 U2.78 U2.79 U2.80 U2.83 U2.84 U2.92 U2.93 U2.97 U2.98

## Polygon pours and split planes (outlines as drawn)
GND on L2 (Ground) "GND_L02_P003" (solid, pour order 3): 63,107.5 116.6,107.5 116.6,55.4 63,55.4

## Silkscreen, mask and mechanical layers (free items; w line width, h text height)
Top Overlay:
  text "USB" at 93.854,104.154 h1.52
  text "+5V" at 73.254,103.654 h1.52
  text "VCC" at 107.454,100.854 h1
  text "UART" at 69.154,71.454 h1.52
  text "TX" at 69.754,68.554 h1
  text "RX" at 69.654,65.854 h1
  text "D0" at 108.454,62.754 h1
  text "RESET" at 70.654,62.354 h1
  text "SWD" at 89.954,61.454 h1.52
  text "X" at 109.154,60.254 h1
  text "RST" at 81.354,59.054 h1
  text "CLK" at 84.754,59.054 h1
  text "DIO" at 88.154,59.054 h1
  text "SWO" at 91.254,59.054 h1
  text "+" at 79.654,58.8 h1.52
  text "-" at 94.554,58.692 h1.52
Mechanical 1:
  the board outline again, w0.254

## Text inside footprints (layer, text, board x,y; h text height)
D1: Mechanical 13 "+" at 68.508,88.483 h0.5 r270